# EAGLE board FA_1.1 (EAGLE 9.5.0)
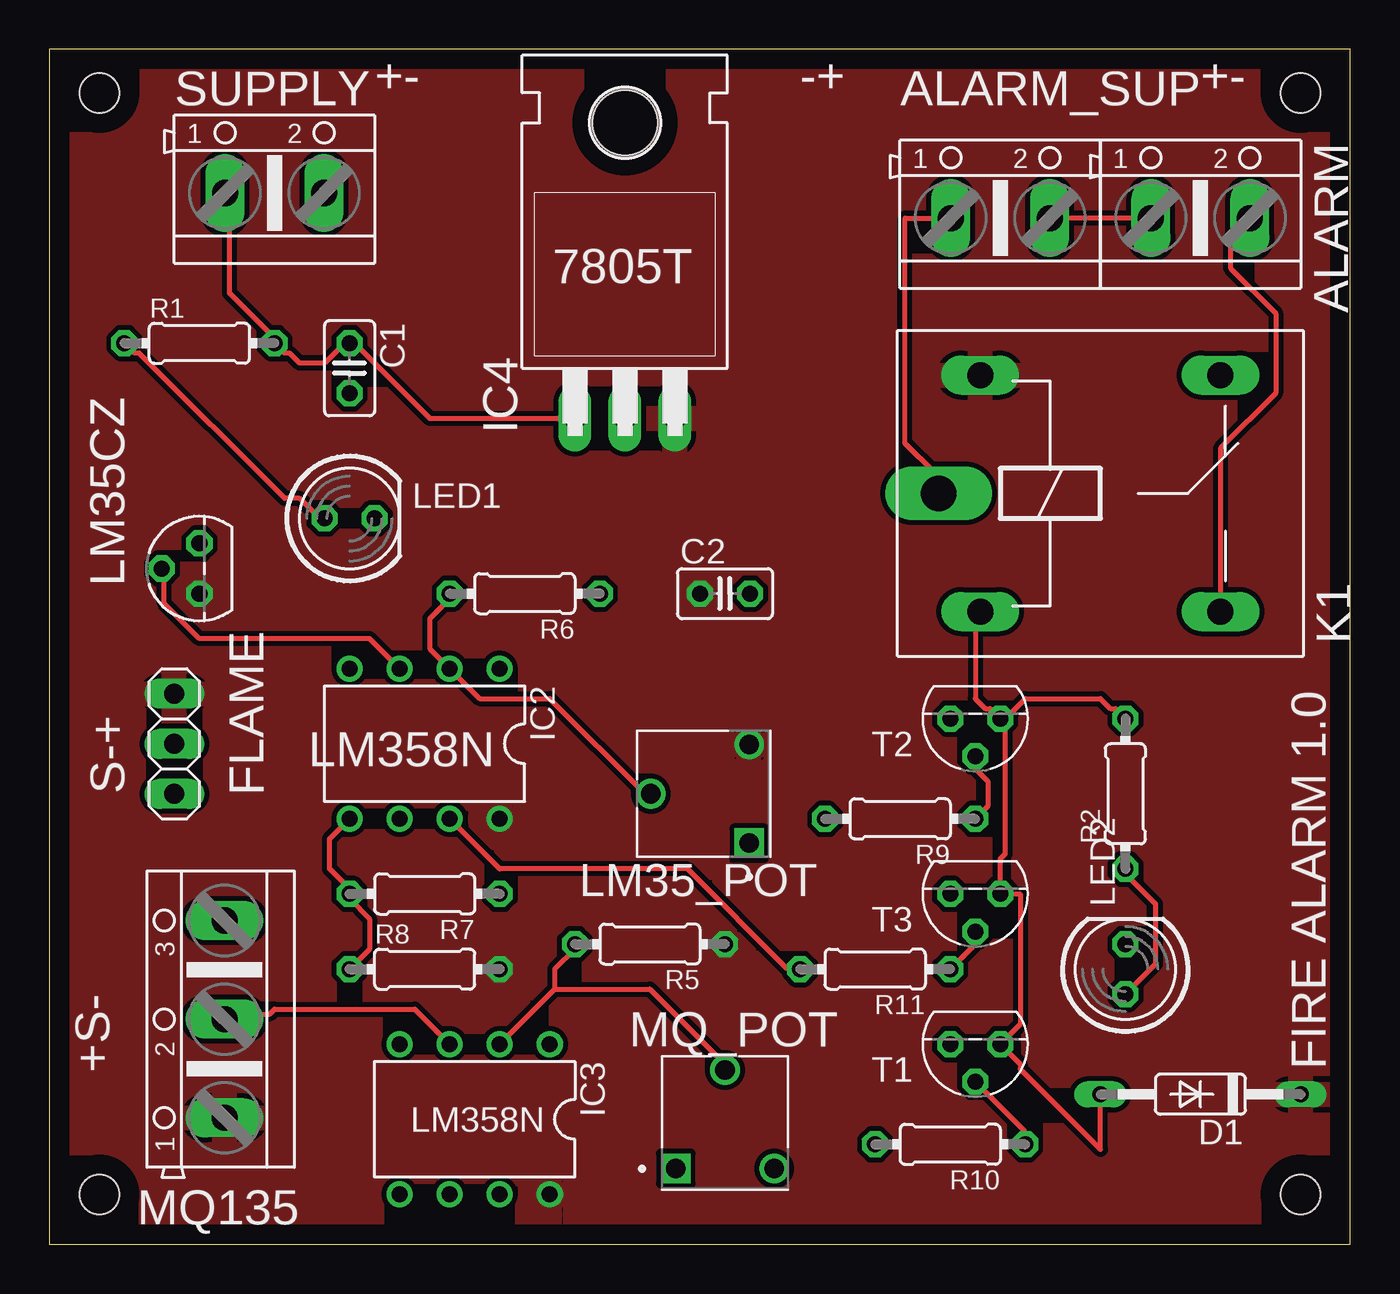
[diagram p0: board, top side]
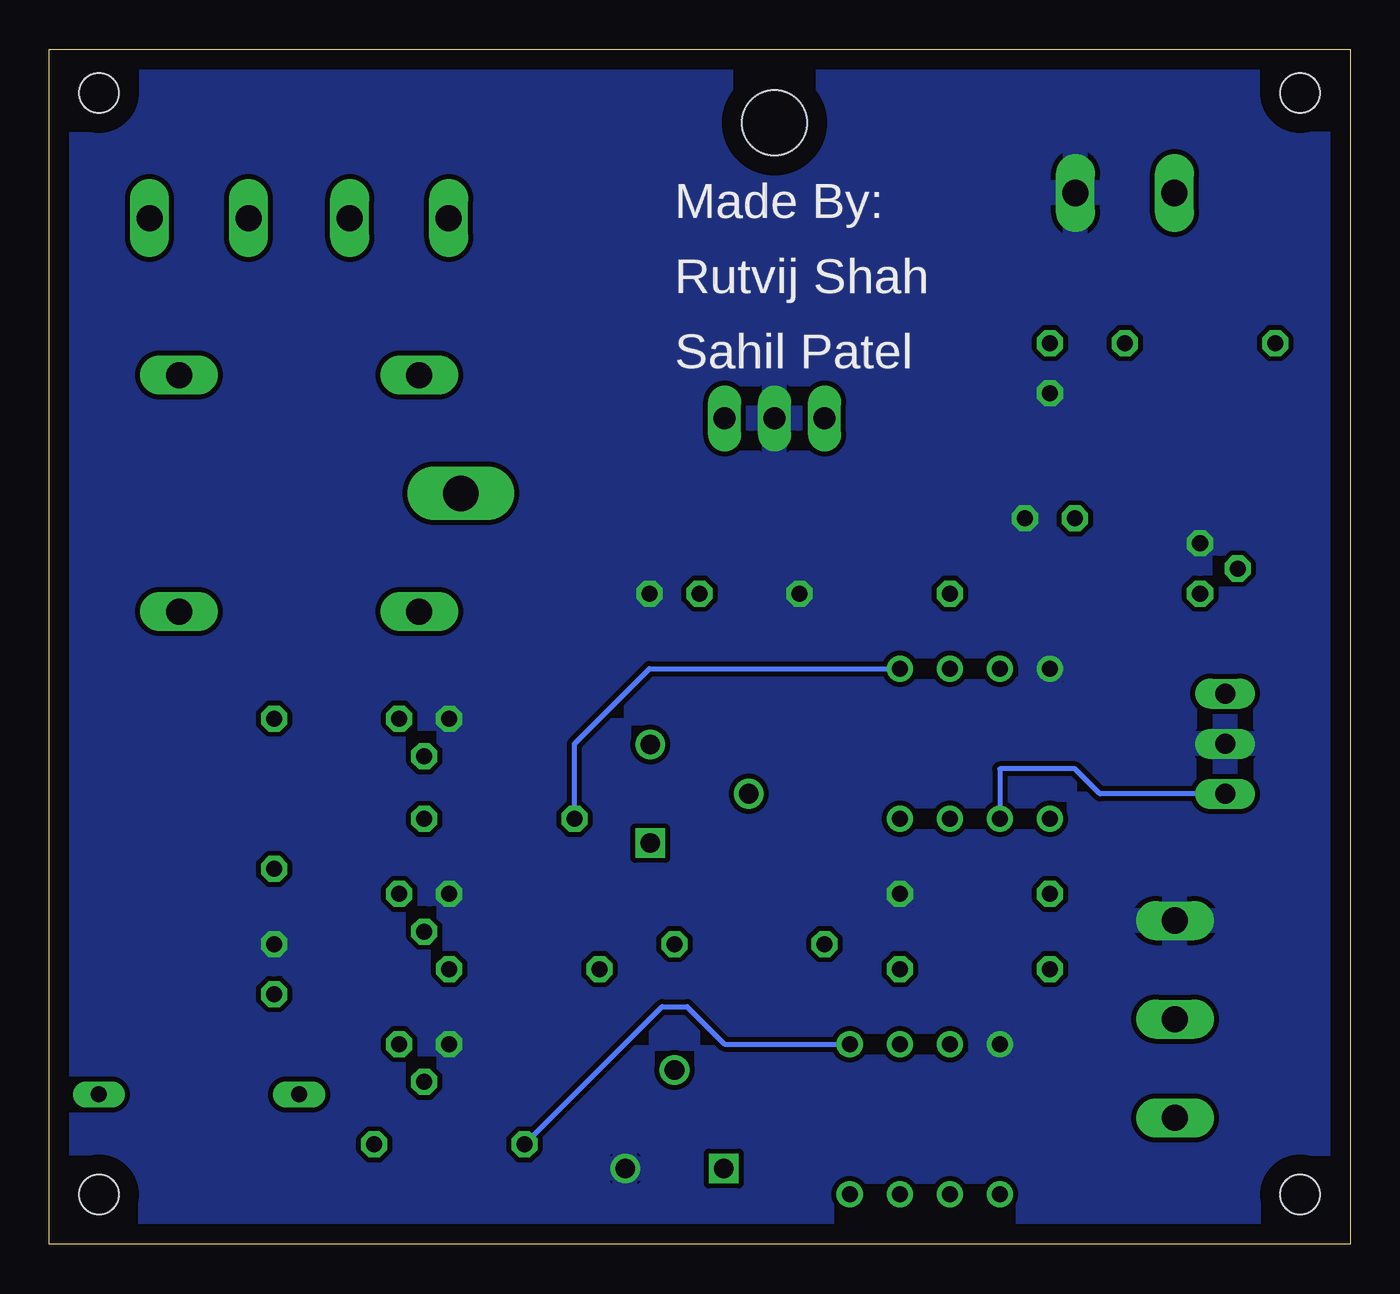
[diagram p1: board, bottom side, seen from below]

Size 66.02 x 60.63 mm. Coordinates in mm from the lower left corner, seen from the top.
Outline: 0,0 66.02,0 66.02,60.63 0,60.63 0,0
Copper layers (1*16): Top 0.035mm / dielectric 1.5mm / Bottom 0.035mm
Design rules "RPS *": minimum track width 10mil, minimum drill 0.35mm, track to track 10mil, track to pad 10mil, pad to pad 10mil, via to via 10mil, smd to smd 6mil, copper to edge 40mil, drill to drill 10mil, minimum pad ring 10mil, minimum via ring 8mil, stop-mask expansion 4mil, vias tented up to drill 0mil, thermal gap 10mil
Holes 2 mm at 2.54,58.42 63.5,58.42 63.5,2.54 2.54,2.54

## Footprints (pad centres in the part's own frame; a part is rotated, then mirrored left to right if it is on the bottom)
AK500/2 = drill 1.321 long: 1 -2.515,0; 2 2.515,0
C025-025X050 = drill 0.813 octagon: 1 -1.27,0; 2 1.27,0
DO35-10 = drill 0.813 long: A 5.08,0; C -5.08,0
1X03 = drill 1.016 long: 1 -2.54,0; 2 0,0; 3 2.54,0
TO92 = drill 0.813 octagon: 1 -1.27,0; 2 0,1.905; 3 1.27,0
DIL08 = drill 0.813 pad 1.27: 1 -3.81,-3.81; 2 -1.27,-3.81; 3 1.27,-3.81; 4 3.81,-3.81; 5 3.81,3.81; 6 1.27,3.81; 7 -1.27,3.81; 8 -3.81,3.81
TO220H = drill 1.118 long: 1 -2.54,-10.16; 2 0,-10.16; 3 2.54,-10.16 | hole 3.302: 0,4.826
ZF112 = drill 1.321 long: 1 -6.096,5.994; 2 -6.096,-5.994; O 6.096,5.994; S 6.096,-5.994 | drill 1.803 long: P -8.204,0
LED5MM = drill 0.813 octagon: A -1.27,0; K 1.27,0
TRIM_EVN-D8AA03B14 = drill 1 square: 1 -2.5,-2.5 | drill 1: 2 0,2.5; 3 2.5,-2.5
AK500/3 = drill 1.321 long: 1 -5.004,0; 2 0,0; 3 5.004,0
0204/7 = drill 0.813 octagon: 1 -3.81,0; 2 3.81,0
TO92' = drill 0.813 octagon: 1 1.27,0; 2 0,1.905; 3 -1.27,0

## Placement (x,y rotation side)
ALARM  [AK500/2]  58.42,52.07 0 top
ALARM_SUP  [AK500/2]  48.26,52.07 0 top
C1  [C025-025X050]  15.24,44.45 270 top
C2  [C025-025X050]  34.29,33.02 0 top
D1  1N4446  [DO35-10]  58.42,7.62 180 top
FLAME  [1X03]  6.35,25.4 90 top
IC1  LM35CZ  [TO92]  7.62,34.29 90 top
IC2  LM358N  [DIL08]  19.05,25.4 180 top
IC3  LM358N  [DIL08]  21.59,6.35 180 top
IC4  7805T  [TO220H]  29.21,52.07 0 top
K1  ZF112  [ZF112]  53.34,38.1 0 top
LED1  [LED5MM]  15.24,36.83 0 top
LED2  [LED5MM]  54.61,13.97 90 top
LM35_POT  EVN-D8AA03B14  [TRIM_EVN-D8AA03B14]  33.02,22.86 90 top
MQ135  [AK500/3]  8.89,11.43 90 top
MQ_POT  EVN-D8AA03B14  [TRIM_EVN-D8AA03B14]  34.29,6.35 0 top
R1  [0204/7]  7.62,45.72 0 top
R2  4.7K  [0204/7]  54.61,22.86 90 top
R5  [0204/7]  30.48,15.24 180 top
R6  [0204/7]  24.13,33.02 180 top
R7  [0204/7]  19.05,17.78 180 top
R8  [0204/7]  19.05,13.97 0 top
R9  220  [0204/7]  43.18,21.59 180 top
R10  220  [0204/7]  45.72,5.08 180 top
R11  220  [0204/7]  41.91,13.97 180 top
SUPPLY  [AK500/2]  11.43,53.34 0 top
T1  BC547  [TO92']  46.99,10.16 180 top
T2  BC547  [TO92']  46.99,26.67 180 top
T3  BC547  [TO92']  46.99,17.78 180 top

## Library data of the parts
ALARM ALARM_SUP MQ135 SUPPLY = con-ptr500; OC_FARNELL: unknown; OC_NEWARK: unknown
C1 C2 = rcl; SPICEPREFIX: C
D1 = diode
FLAME = pinhead
IC1 = lm35
IC2-IC4 = linear
K1 = relay; OC_FARNELL: unknown; OC_NEWARK: unknown
LED1 LED2 = led
LM35_POT MQ_POT = EVN-D8AA03B14; AVAILABILITY: Unavailable; DESCRIPTION: Trimmer; Carbon; Rest 10 Kilohms; PCB; 1 Turn; Pwr-Rtg 0.1 W; Linear; Top Adj; 6 mm SQ; MF: Panasonic Electronic; MP: EVN-D8AA03B14; PACKAGE: PQFP-44 Panasonic; PRICE: None
R1 R2 R5-R11 = rcl; SPICEPREFIX: R
T1-T3 = transistor

## Nets
+5V: C2.1 D1.C FLAME.3 IC1.1 IC2.8 IC3.8 IC4.3 K1.1 LM35_POT.3 MQ135.1 R5.1 R8.2
+12V: C1.1 IC4.1 R1.2 SUPPLY.1
GND: C1.2 C2.2 FLAME.2 IC1.3 IC2.4 IC3.4 IC4.2 LED1.K LED2.K MQ135.3 MQ_POT.3 R6.1 R7.1 SUPPLY.2 T1.1 T2.1 T3.1
LMREF: IC2.2 LM35_POT.2 R6.2
MQREF: IC3.2 MQ_POT.2 R5.2
N$1: IC3.1 R10.2
N$2: R10.1 T1.2
N$3: IC2.1 R9.2
N$4: D1.A K1.2 R2.2 T1.3 T2.3 T3.3
N$5: IC1.2 IC2.3
N$6: FLAME.1 IC2.6
N$7: IC3.3 MQ135.2
N$8: LED1.A R1.1
N$9: LED2.A R2.1
N$10: ALARM.2 K1.S
N$11: ALARM.1 ALARM_SUP.2
N$12: ALARM_SUP.1 K1.P
N$13: IC2.5 R7.2 R8.1
N$14: R9.1 T2.2
N$15: IC2.7 R11.2
N$16: R11.1 T3.2

## Tracks (layer width: path | path; a pad name or v marks a point on that pad's centre or on a via)
+5V
  pour Top: -11.43,72.39 -11.43,-53.34 -1.27,-63.5 170.18,-63.5 185.42,-48.26 185.42,66.04 179.07,72.39
+12V
  Top 0.254: IC4.1 19.3,41.91 15.49,45.72 C1.1 14.99,45.72 13.97,44.7 12.7,44.7 12.19,45.21 11.94,45.21 R1.2 11.43,45.97 9.14,48.26 9.14,53.34 SUPPLY.1
GND
  pour Bottom: -17.78,68.58 -17.78,-48.26 -13.97,-52.07 162.56,-52.07 172.72,-41.91 172.72,58.42 163.83,67.31 -10.16,67.31 -11.43,68.58
LMREF
  Top 0.254: R6.2 20.32,32.77 19.3,31.75 19.3,30.23 IC2.2 21.84,27.69 25.4,27.69 30.23,22.86 LM35_POT.2
MQREF
  Top 0.254: 25.65,12.95 IC3.2 | 25.65,12.95 25.65,13.97 26.67,14.99 R5.2 | MQ_POT.2 34.29,9.14 30.48,12.95 25.65,12.95
N$1
  Bottom 0.254: IC3.1 31.75,10.16 33.66,12.07 34.92,12.07 R10.2
N$2
  Top 0.254: T1.2 49.53,5.72 R10.1
N$3
  Bottom 0.254: IC2.1 35.56,29.21 39.37,25.4 R9.2
N$4
  Top 0.254: K1.2 47.24,32 46.99,31.75 46.99,27.69 47.5,27.18 47.75,27.18 T2.3 48.51,26.67 | R2.2 54.1,27.18 53.85,27.18 53.34,27.69 49.53,27.69 48.51,26.67 | D1.A 53.34,4.83 49.28,8.89 49.28,9.14 T1.3 49.28,11.18 49.28,17.78 T3.3 48.26,19.56 48.51,19.81 48.51,26.67
N$5
  Top 0.254: IC2.3 16.26,30.73 7.62,30.73 5.84,32.51 5.84,34.29 IC1.2
N$6
  Bottom 0.254: FLAME.1 12.7,22.86 13.97,24.13 17.78,24.13 IC2.6
N$7
  Top 0.254: IC3.3 18.54,11.94 11.43,11.94 11.18,11.68 9.14,11.68 MQ135.2
N$8
  Top 0.254: R1.1 4.32,45.21 4.57,45.21 11.94,37.85 12.7,37.85 13.72,36.83 LED1.A
N$9
  Top 0.254: LED2.A 56.13,14.22 56.13,17.27 54.61,18.8 R2.1
N$10
  Top 0.254: K1.S 59.44,40.39 62.23,43.18 62.23,47.24 59.94,49.53 59.94,51.08 ALARM.2
N$11
  Top 0.254: ALARM.1 ALARM_SUP.2
N$12
  Top 0.254: ALARM_SUP.1 43.43,52.07 43.43,40.64 44.96,39.12 44.96,38.1 K1.P
N$13
  Top 0.254: R8.1 16.26,14.99 16.26,16.51 15.24,17.53 R7.2 15.24,18.03 14.22,19.05 14.22,20.57 IC2.5
N$14
  Top 0.254: R9.1 47.62,22.23 47.62,23.5 46.99,24.13 T2.2
N$15
  Top 0.254: IC2.7 22.86,19.05 32.38,19.05 37.47,13.97 R11.2
N$16
  Top 0.254: R11.1 46.99,15.24 T3.2

## Text on the board
tNames: +- | -+ | +- | S-+ | +S- | FIRE ALARM 1.0
bNames: Made By: | Rutvij Shah | Sahil Patel